# EAGLE board NEW_POT (EAGLE 7.5.0)
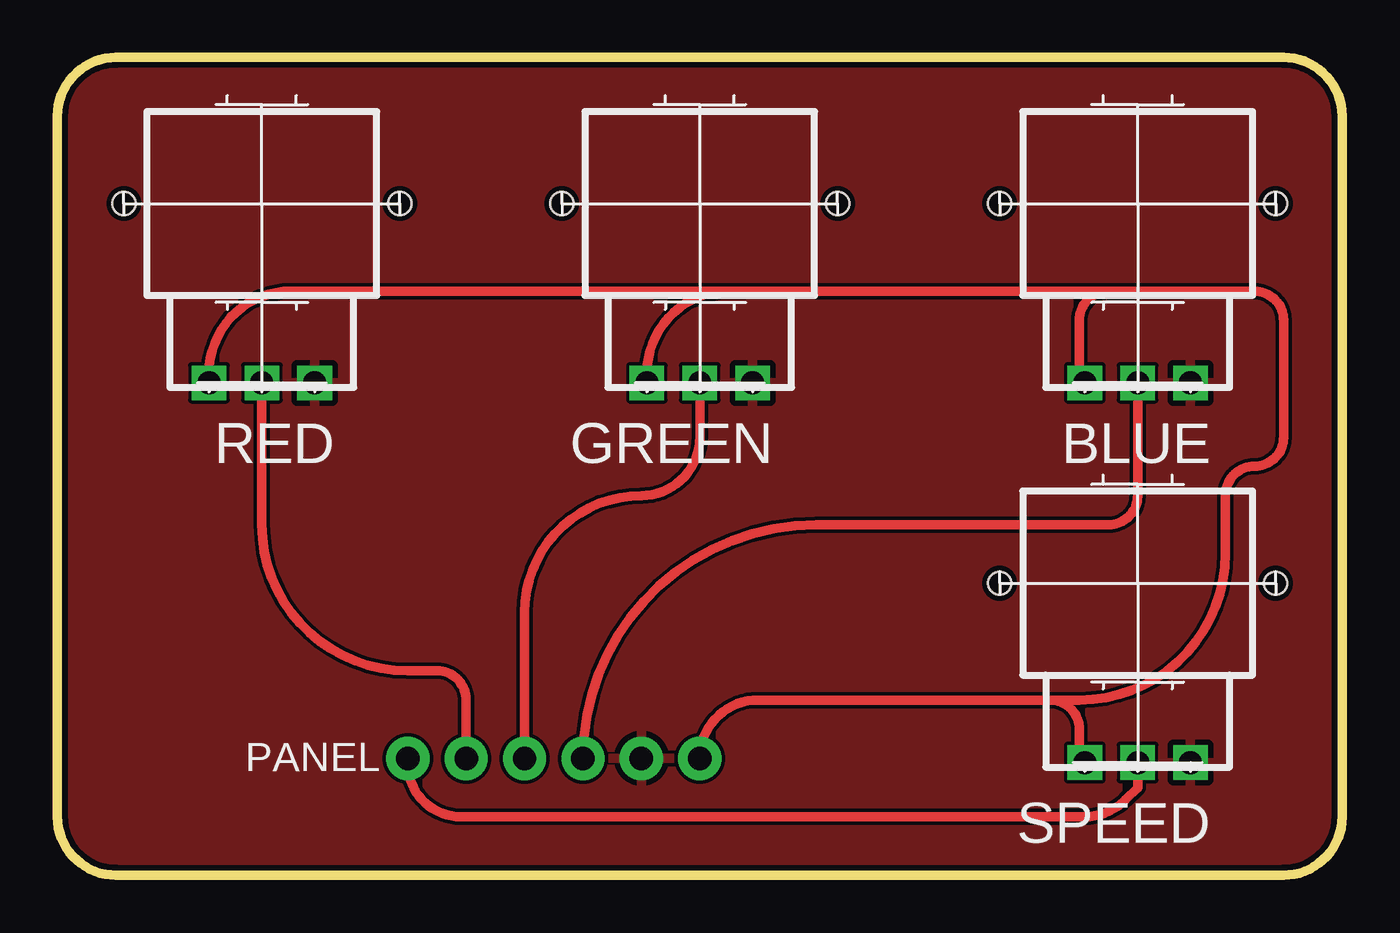
[diagram p0: board, top side]
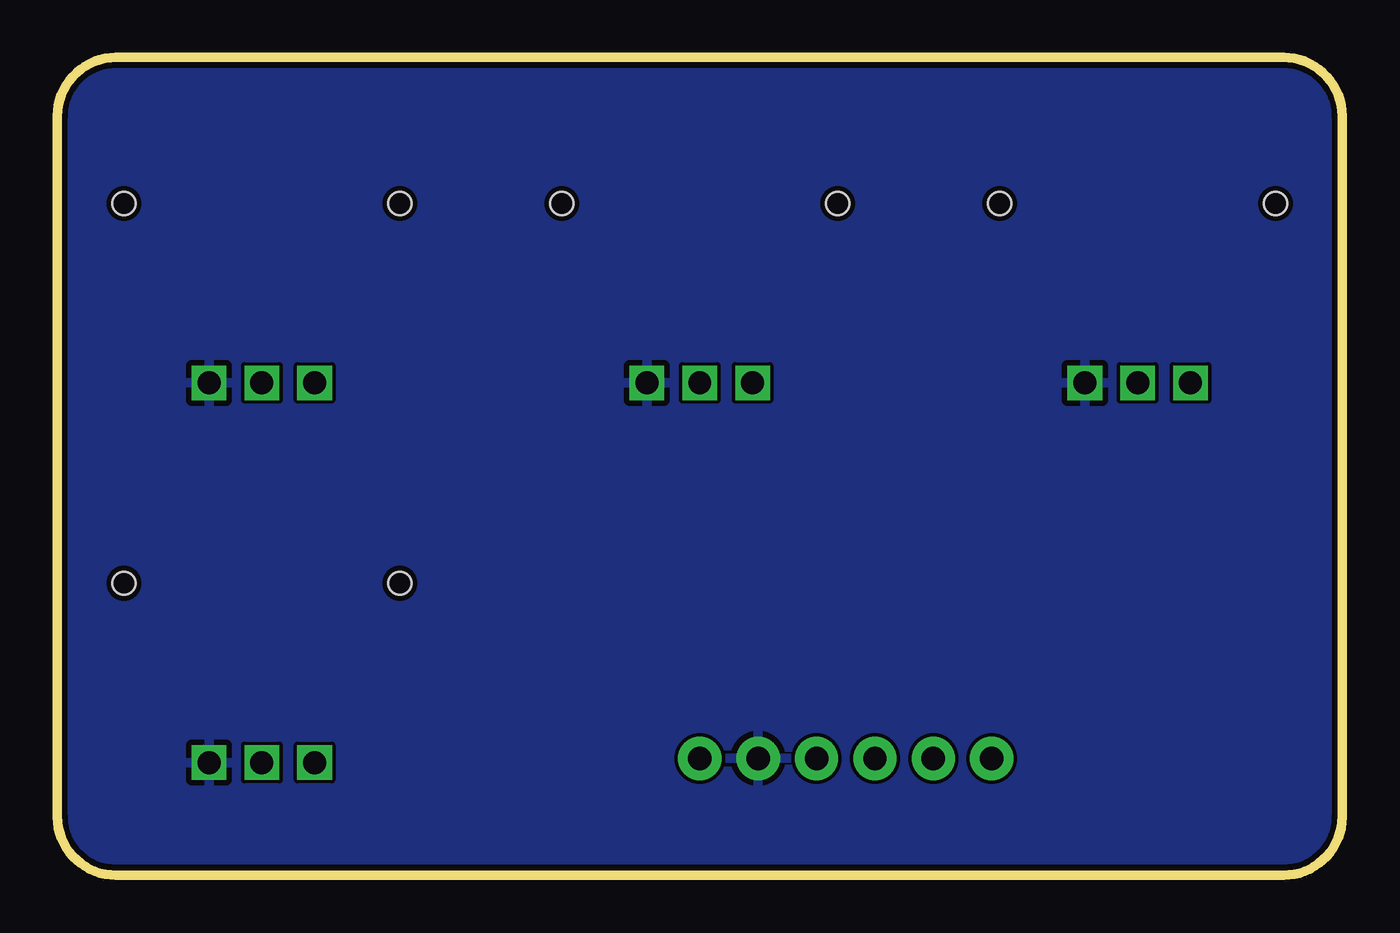
[diagram p1: board, bottom side, seen from below]

Size 55.88 x 35.56 mm. Coordinates in mm from the lower left corner, seen from the top.
Outline: 0,33.02 0,2.54 arc90 2.54,0 53.34,0 arc90 55.88,2.54 55.88,33.02 arc90 53.34,35.56 2.54,35.56 arc90 0,33.02
Copper layers (1*16): Top 0.035mm / dielectric 1.5mm / Bottom 0.035mm
Design rules "seeedstudio_2l_gru": minimum track width 6mil, minimum drill 12mil, track to track 6mil, track to pad 6mil, pad to pad 6mil, via to via 6mil, smd to smd 0mil, copper to edge 10mil, drill to drill 10mil, minimum pad ring 10mil, minimum via ring 6mil, stop-mask expansion 2mil, vias tented up to drill 100mil, thermal gap 10mil
Net classes: 0 default: width 0.254 mm

## Footprints (pad centres in the part's own frame; a part is rotated, then mirrored left to right if it is on the bottom)
POT_1 = drill 1 square: P1 -2.3,-7.8; P2 0,-7.8; P3 2.3,-7.8 | hole 1: -6,0; 6,0
1X06_NO_SILK = drill 1.016 pad 1.88: 1 0,0; 2 2.54,0; 3 5.08,0; 4 7.62,0; 5 10.16,0; 6 12.7,0

## Placement (x,y rotation side)
DAS  1  [POT_1]  8.89,29.21 0 top
PANEL  [1X06_NO_SILK]  27.94,5.08 180 top
U$2  POT_1  [POT_1]  27.94,29.21 0 top
U$3  POT_1  [POT_1]  46.99,29.21 0 top
U$4  POT_1  [POT_1]  46.99,12.7 0 top

## Library data of the parts
DAS U$2-U$4 = RodrigoMarques_Parts
PANEL = SparkFun-Connectors; PROD_ID: CONN-08437

## Nets
BLUE_BRAIN: PANEL.4 U$2.P2
GND: DAS.P3 PANEL.2 U$2.P3 U$3.P3 U$4.P3
GREEN_BRAIN: DAS.P2 PANEL.5
RED_BRAIN: PANEL.3 U$3.P2
SPEED_BRAIN: PANEL.6 U$4.P2
V_5V: DAS.P1 PANEL.1 U$2.P1 U$3.P1 U$4.P1

## Tracks (layer width: path | path; a pad name or v marks a point on that pad's centre or on a via)
BLUE_BRAIN
  Top 0.406: PANEL.4 20.32,11.43 arc-90 25.4,16.51 arc90 27.94,19.05 U$2.P2
GND
  pour Top: -10.16,86.36 -10.16,-8.89 107.95,-8.89 107.95,86.36
  pour Bottom: -2.54,41.91 -2.54,-2.54 64.77,-2.54 64.77,41.91
GREEN_BRAIN
  Top 0.406: DAS.P2 8.89,15.24 arc90 15.24,8.89 16.51,8.89 arc-90 17.78,7.62 PANEL.5
RED_BRAIN
  Top 0.406: U$3.P2 46.99,16.51 arc-90 45.72,15.24 33.02,15.24 arc90 PANEL.3
SPEED_BRAIN
  Top 0.406: PANEL.6 15.24,4.86 arc90 17.56,2.54 44.67,2.54 arc45 46.46,3.28 46.99,3.81 U$4.P2
V_5V
  Top 0.406: 43.18,7.62 arc-90 44.45,6.35 44.45,5.08 arc90 44.63,4.9 U$4.P1 | 43.18,7.62 44.45,7.62 arc90 50.8,13.97 50.8,16.51 arc-90 52.07,17.78 arc90 53.34,19.05 53.34,24.13 arc90 52.07,25.4 45.72,25.4 | 45.72,25.4 arc90 44.45,24.13 44.45,21.59 arc90 44.63,21.41 U$3.P1 | U$2.P1 25.64,21.83 arc-90 29.21,25.4 | 29.21,25.4 45.72,25.4 | DAS.P1 6.59,21.83 arc-90 10.16,25.4 29.21,25.4 | PANEL.1 arc-90 30.48,7.62 43.18,7.62

## Text on the board
tNames: RED | GREEN | BLUE | SPEED